# EAGLE board Qwiic-Grideye-Panel (EAGLE 7.7.0)
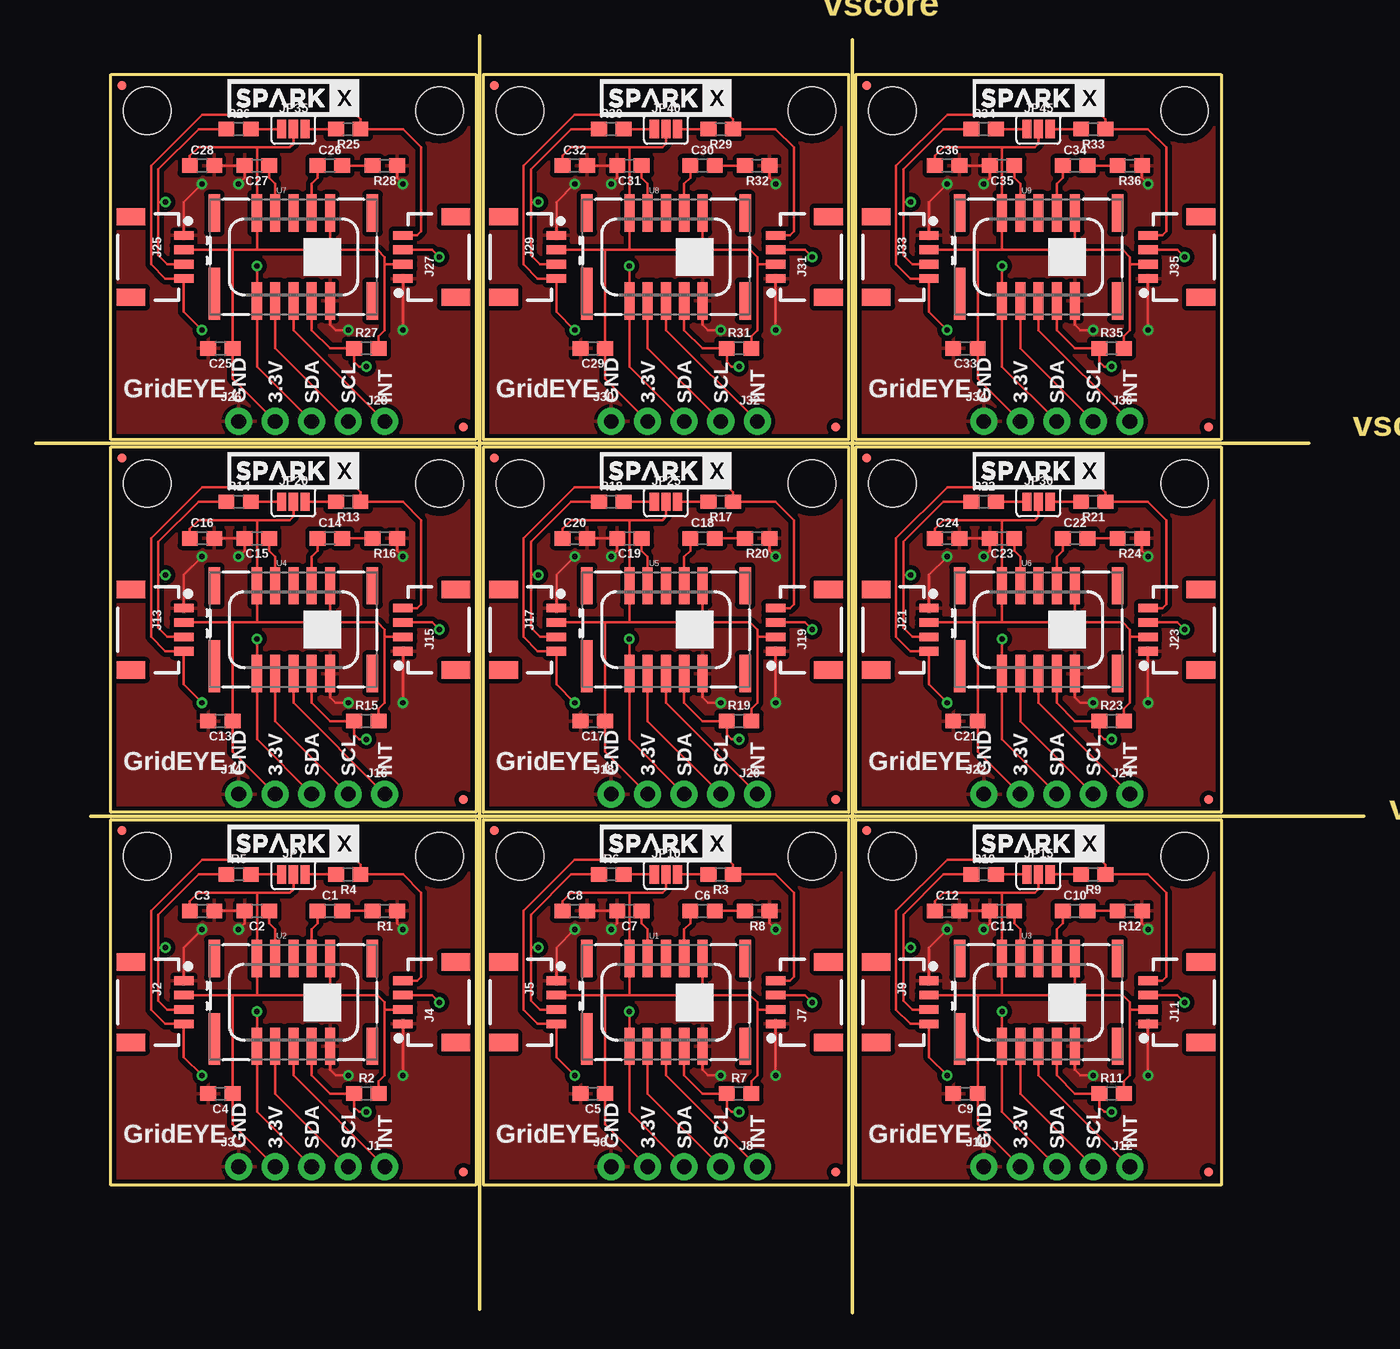
[diagram p0: board, top side]
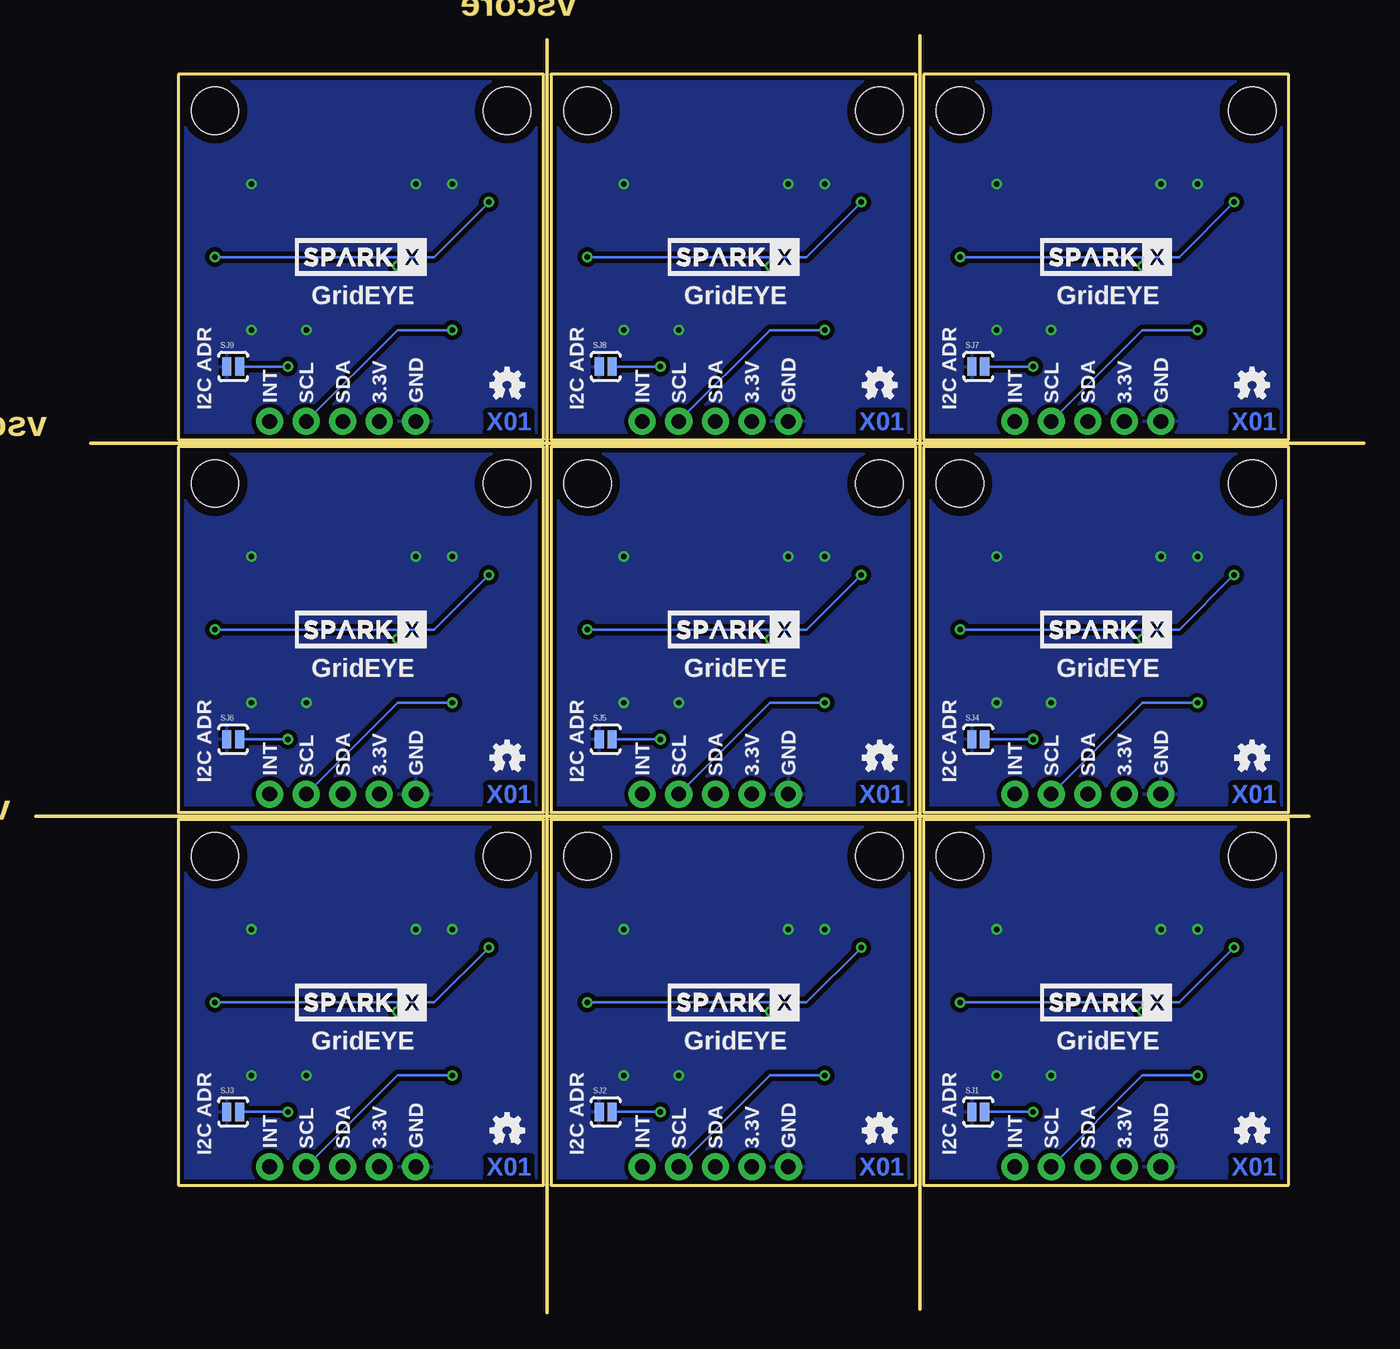
[diagram p1: board, bottom side, seen from below]

Size 92.33 x 88.77 mm. Coordinates in mm from the lower left corner, seen from the top.
Outline: 3.81,34.54 92.33,34.54
Outline: 0,60.45 88.52,60.45
Outline: 56.77,0 56.77,88.52
Outline: 30.86,0.25 30.86,88.77
Outline: 5.21,8.89 5.21,34.29 30.61,34.29 30.61,8.89 5.21,8.89
Outline: 31.12,8.89 31.12,34.29 56.52,34.29 56.52,8.89 31.12,8.89
Outline: 57.02,8.89 57.02,34.29 82.42,34.29 82.42,8.89 57.02,8.89
Outline: 5.21,34.8 5.21,60.2 30.61,60.2 30.61,34.8 5.21,34.8
Outline: 31.12,34.8 31.12,60.2 56.52,60.2 56.52,34.8 31.12,34.8
Outline: 57.02,34.8 57.02,60.2 82.42,60.2 82.42,34.8 57.02,34.8
Outline: 5.21,60.71 5.21,86.11 30.61,86.11 30.61,60.71 5.21,60.71
Outline: 31.12,60.71 31.12,86.11 56.52,86.11 56.52,60.71 31.12,60.71
Outline: 57.02,60.71 57.02,86.11 82.42,86.11 82.42,60.71 57.02,60.71
Copper layers (1*16): Top 0.035mm / dielectric 1.5mm / Bottom 0.035mm
Design rules "SparkFun-2-layer-TIGHT": minimum track width 7mil, minimum drill 15mil, track to track 7mil, track to pad 7mil, pad to pad 7mil, via to via 7mil, smd to smd 7mil, copper to edge 7mil, drill to drill 7mil, minimum pad ring 7mil, minimum via ring 7mil, stop-mask expansion 4mil, vias tented up to drill 25mil, thermal gap 10mil

## Footprints (pad centres in the part's own frame; a part is rotated, then mirrored left to right if it is on the bottom)
0603 = smd 1.1 x 1: 1 -0.85,0; 2 0.85,0
1X01_NO_SILK = drill 1.016 pad 1.88: 1 0,0
1X04_1MM_RA = smd 0.6 x 1.35: 1 -1.5,0; 2 -0.5,0; 3 0.5,0; 4 1.5,0 | smd 1.2 x 2: NC1 2.8,-3.675; NC2 -2.8,-3.675
1X04_NO_SILK = drill 1.016 pad 1.88: 1 0,0; 2 2.54,0; 3 5.08,0; 4 7.62,0
STAND-OFF = hole 3.302: 0,0
MICRO-FIDUCIAL = smd 0.635 x 0.635: 1 0,0
SMT-JUMPER_3_2-NC_PASTE_SILK = smd 0.635 x 1.27: 1 -0.813,0; 2 0,0; 3 0.813,0
SJ_2S-NO = smd 0.635 x 1.27: 1 -0.45,0; 2 0.45,0
GRIDEYE-AMG88 = smd 0.8 x 3.6: 1 -5.5,-2.55 | smd 0.7 x 2.6: 2 -2.54,-3.05; 3 -1.27,-3.05; 4 0,-3.05; 5 1.27,-3.05; 6 2.54,-3.05; 9 2.54,3.05; 10 1.27,3.05; 11 0,3.05; 12 -1.27,3.05; 13 -2.54,3.05 | smd 0.8 x 2.6: 7 5.5,-3.05; 8 5.5,3.05; 14 -5.5,3.05

## Placement (x,y rotation side)
C1  1.0uF  [0603]  20.45,27.94 0 top
C2  2.2uF  [0603]  15.37,27.94 180 top
C3  10uF  [0603]  11.56,27.94 0 top
C4  0.1uF  [0603]  12.83,15.24 180 top
C5  0.1uF  [0603]  38.73,15.24 180 top
C6  1.0uF  [0603]  46.36,27.94 0 top
C7  2.2uF  [0603]  41.27,27.94 180 top
C8  10uF  [0603]  37.47,27.94 0 top
C9  0.1uF  [0603]  64.64,15.24 180 top
C10  1.0uF  [0603]  72.26,27.94 0 top
C11  2.2uF  [0603]  67.18,27.94 180 top
C12  10uF  [0603]  63.37,27.94 0 top
C13  0.1uF  [0603]  12.83,41.15 180 top
C14  1.0uF  [0603]  20.45,53.85 0 top
C15  2.2uF  [0603]  15.37,53.85 180 top
C16  10uF  [0603]  11.56,53.85 0 top
C17  0.1uF  [0603]  38.73,41.15 180 top
C18  1.0uF  [0603]  46.36,53.85 0 top
C19  2.2uF  [0603]  41.27,53.85 180 top
C20  10uF  [0603]  37.47,53.85 0 top
C21  0.1uF  [0603]  64.64,41.15 180 top
C22  1.0uF  [0603]  72.26,53.85 0 top
C23  2.2uF  [0603]  67.18,53.85 180 top
C24  10uF  [0603]  63.37,53.85 0 top
C25  0.1uF  [0603]  12.83,67.06 180 top
C26  1.0uF  [0603]  20.45,79.76 0 top
C27  2.2uF  [0603]  15.37,79.76 180 top
C28  10uF  [0603]  11.56,79.76 0 top
C29  0.1uF  [0603]  38.73,67.06 180 top
C30  1.0uF  [0603]  46.36,79.76 0 top
C31  2.2uF  [0603]  41.27,79.76 180 top
C32  10uF  [0603]  37.47,79.76 0 top
C33  0.1uF  [0603]  64.64,67.06 180 top
C34  1.0uF  [0603]  72.26,79.76 0 top
C35  2.2uF  [0603]  67.18,79.76 180 top
C36  10uF  [0603]  63.37,79.76 0 top
J1  [1X01_NO_SILK]  24.26,10.16 0 top
J2  SMD  [1X04_1MM_RA]  10.29,21.59 270 top
J3  PTH  [1X04_NO_SILK]  14.1,10.16 0 top
J4  SMD  [1X04_1MM_RA]  25.53,21.59 90 top
J5  SMD  [1X04_1MM_RA]  36.2,21.59 270 top
J6  PTH  [1X04_NO_SILK]  40.01,10.16 0 top
J7  SMD  [1X04_1MM_RA]  51.44,21.59 90 top
J8  [1X01_NO_SILK]  50.16,10.16 0 top
J9  SMD  [1X04_1MM_RA]  62.1,21.59 270 top
J10  PTH  [1X04_NO_SILK]  65.91,10.16 0 top
J11  SMD  [1X04_1MM_RA]  77.34,21.59 90 top
J12  [1X01_NO_SILK]  76.07,10.16 0 top
J13  SMD  [1X04_1MM_RA]  10.29,47.5 270 top
J14  PTH  [1X04_NO_SILK]  14.1,36.07 0 top
J15  SMD  [1X04_1MM_RA]  25.53,47.5 90 top
J16  [1X01_NO_SILK]  24.26,36.07 0 top
J17  SMD  [1X04_1MM_RA]  36.2,47.5 270 top
J18  PTH  [1X04_NO_SILK]  40.01,36.07 0 top
J19  SMD  [1X04_1MM_RA]  51.44,47.5 90 top
J20  [1X01_NO_SILK]  50.16,36.07 0 top
J21  SMD  [1X04_1MM_RA]  62.1,47.5 270 top
J22  PTH  [1X04_NO_SILK]  65.91,36.07 0 top
J23  SMD  [1X04_1MM_RA]  77.34,47.5 90 top
J24  [1X01_NO_SILK]  76.07,36.07 0 top
J25  SMD  [1X04_1MM_RA]  10.29,73.41 270 top
J26  PTH  [1X04_NO_SILK]  14.1,61.98 0 top
J27  SMD  [1X04_1MM_RA]  25.53,73.41 90 top
J28  [1X01_NO_SILK]  24.26,61.98 0 top
J29  SMD  [1X04_1MM_RA]  36.2,73.41 270 top
J30  PTH  [1X04_NO_SILK]  40.01,61.98 0 top
J31  SMD  [1X04_1MM_RA]  51.44,73.41 90 top
J32  [1X01_NO_SILK]  50.16,61.98 0 top
J33  SMD  [1X04_1MM_RA]  62.1,73.41 270 top
J34  PTH  [1X04_NO_SILK]  65.91,61.98 0 top
J35  SMD  [1X04_1MM_RA]  77.34,73.41 90 top
J36  [1X01_NO_SILK]  76.07,61.98 0 top
JP1  STAND-OFF  [STAND-OFF]  33.66,31.75 0 top
JP2  FIDUCIALUFIDUCIAL  [MICRO-FIDUCIAL]  29.72,9.78 0 top
JP3  STAND-OFF  [STAND-OFF]  7.75,31.75 0 top
JP4  STAND-OFF  [STAND-OFF]  28.07,31.75 0 top
JP5  STAND-OFF  [STAND-OFF]  53.98,31.75 0 top
JP6  FIDUCIALUFIDUCIAL  [MICRO-FIDUCIAL]  5.97,33.53 0 top
JP7  [SMT-JUMPER_3_2-NC_PASTE_SILK]  17.91,30.48 0 top
JP8  FIDUCIALUFIDUCIAL  [MICRO-FIDUCIAL]  55.63,9.78 0 top
JP9  FIDUCIALUFIDUCIAL  [MICRO-FIDUCIAL]  31.88,33.53 0 top
JP10  [SMT-JUMPER_3_2-NC_PASTE_SILK]  43.81,30.48 0 top
JP11  STAND-OFF  [STAND-OFF]  59.56,31.75 0 top
JP12  STAND-OFF  [STAND-OFF]  79.88,31.75 0 top
JP13  FIDUCIALUFIDUCIAL  [MICRO-FIDUCIAL]  81.53,9.78 0 top
JP14  FIDUCIALUFIDUCIAL  [MICRO-FIDUCIAL]  57.79,33.53 0 top
JP15  [SMT-JUMPER_3_2-NC_PASTE_SILK]  69.72,30.48 0 top
JP16  STAND-OFF  [STAND-OFF]  7.75,57.66 0 top
JP17  STAND-OFF  [STAND-OFF]  28.07,57.66 0 top
JP18  FIDUCIALUFIDUCIAL  [MICRO-FIDUCIAL]  29.72,35.69 0 top
JP19  FIDUCIALUFIDUCIAL  [MICRO-FIDUCIAL]  5.97,59.44 0 top
JP20  [SMT-JUMPER_3_2-NC_PASTE_SILK]  17.91,56.39 0 top
JP21  STAND-OFF  [STAND-OFF]  33.66,57.66 0 top
JP22  STAND-OFF  [STAND-OFF]  53.98,57.66 0 top
JP23  FIDUCIALUFIDUCIAL  [MICRO-FIDUCIAL]  55.63,35.69 0 top
JP24  FIDUCIALUFIDUCIAL  [MICRO-FIDUCIAL]  31.88,59.44 0 top
JP25  [SMT-JUMPER_3_2-NC_PASTE_SILK]  43.81,56.39 0 top
JP26  STAND-OFF  [STAND-OFF]  59.56,57.66 0 top
JP27  STAND-OFF  [STAND-OFF]  79.88,57.66 0 top
JP28  FIDUCIALUFIDUCIAL  [MICRO-FIDUCIAL]  81.53,35.69 0 top
JP29  FIDUCIALUFIDUCIAL  [MICRO-FIDUCIAL]  57.79,59.44 0 top
JP30  [SMT-JUMPER_3_2-NC_PASTE_SILK]  69.72,56.39 0 top
JP31  STAND-OFF  [STAND-OFF]  7.75,83.57 0 top
JP32  STAND-OFF  [STAND-OFF]  28.07,83.57 0 top
JP33  FIDUCIALUFIDUCIAL  [MICRO-FIDUCIAL]  29.72,61.59 0 top
JP34  FIDUCIALUFIDUCIAL  [MICRO-FIDUCIAL]  5.97,85.34 0 top
JP35  [SMT-JUMPER_3_2-NC_PASTE_SILK]  17.91,82.3 0 top
JP36  STAND-OFF  [STAND-OFF]  33.66,83.57 0 top
JP37  STAND-OFF  [STAND-OFF]  53.98,83.57 0 top
JP38  FIDUCIALUFIDUCIAL  [MICRO-FIDUCIAL]  55.63,61.59 0 top
JP39  FIDUCIALUFIDUCIAL  [MICRO-FIDUCIAL]  31.88,85.34 0 top
JP40  [SMT-JUMPER_3_2-NC_PASTE_SILK]  43.81,82.3 0 top
JP41  STAND-OFF  [STAND-OFF]  59.56,83.57 0 top
JP42  STAND-OFF  [STAND-OFF]  79.88,83.57 0 top
JP43  FIDUCIALUFIDUCIAL  [MICRO-FIDUCIAL]  81.53,61.59 0 top
JP44  FIDUCIALUFIDUCIAL  [MICRO-FIDUCIAL]  57.79,85.34 0 top
JP45  [SMT-JUMPER_3_2-NC_PASTE_SILK]  69.72,82.3 0 top
LOGO1  OSHW-LOGOMINI  [OSHW-LOGO-MINI]  7.75,12.7 0 bottom
LOGO2  OSHW-LOGOMINI  [OSHW-LOGO-MINI]  33.66,12.7 0 bottom
LOGO3  OSHW-LOGOMINI  [OSHW-LOGO-MINI]  59.56,12.7 0 bottom
LOGO4  OSHW-LOGOMINI  [OSHW-LOGO-MINI]  7.75,38.61 0 bottom
LOGO5  OSHW-LOGOMINI  [OSHW-LOGO-MINI]  33.66,38.61 0 bottom
LOGO6  OSHW-LOGOMINI  [OSHW-LOGO-MINI]  59.56,38.61 0 bottom
LOGO7  OSHW-LOGOMINI  [OSHW-LOGO-MINI]  7.75,64.52 0 bottom
LOGO8  OSHW-LOGOMINI  [OSHW-LOGO-MINI]  33.66,64.52 0 bottom
LOGO9  OSHW-LOGOMINI  [OSHW-LOGO-MINI]  59.56,64.52 0 bottom
R1  20  [0603]  24.26,27.94 180 top
R2  10k  [0603]  22.99,15.24 0 top
R3  4.7k  [0603]  47.62,30.48 180 top
R4  4.7k  [0603]  21.72,30.48 180 top
R5  4.7k  [0603]  14.1,30.48 0 top
R6  4.7k  [0603]  40.01,30.48 0 top
R7  10k  [0603]  48.9,15.24 0 top
R8  20  [0603]  50.16,27.94 180 top
R9  4.7k  [0603]  73.53,30.48 180 top
R10  4.7k  [0603]  65.91,30.48 0 top
R11  10k  [0603]  74.8,15.24 0 top
R12  20  [0603]  76.07,27.94 180 top
R13  4.7k  [0603]  21.72,56.39 180 top
R14  4.7k  [0603]  14.1,56.39 0 top
R15  10k  [0603]  22.99,41.15 0 top
R16  20  [0603]  24.26,53.85 180 top
R17  4.7k  [0603]  47.62,56.39 180 top
R18  4.7k  [0603]  40.01,56.39 0 top
R19  10k  [0603]  48.9,41.15 0 top
R20  20  [0603]  50.16,53.85 180 top
R21  4.7k  [0603]  73.53,56.39 180 top
R22  4.7k  [0603]  65.91,56.39 0 top
R23  10k  [0603]  74.8,41.15 0 top
R24  20  [0603]  76.07,53.85 180 top
R25  4.7k  [0603]  21.72,82.3 180 top
R26  4.7k  [0603]  14.1,82.3 0 top
R27  10k  [0603]  22.99,67.06 0 top
R28  20  [0603]  24.26,79.76 180 top
R29  4.7k  [0603]  47.62,82.3 180 top
R30  4.7k  [0603]  40.01,82.3 0 top
R31  10k  [0603]  48.9,67.06 0 top
R32  20  [0603]  50.16,79.76 180 top
R33  4.7k  [0603]  73.53,82.3 180 top
R34  4.7k  [0603]  65.91,82.3 0 top
R35  10k  [0603]  74.8,67.06 0 top
R36  20  [0603]  76.07,79.76 180 top
SJ1  [SJ_2S-NO]  26.8,13.97 0 bottom
SJ2  [SJ_2S-NO]  52.7,13.97 0 bottom
SJ3  [SJ_2S-NO]  78.61,13.97 0 bottom
SJ4  [SJ_2S-NO]  26.8,39.88 0 bottom
SJ5  [SJ_2S-NO]  52.7,39.88 0 bottom
SJ6  [SJ_2S-NO]  78.61,39.88 0 bottom
SJ7  [SJ_2S-NO]  26.8,65.79 0 bottom
SJ8  [SJ_2S-NO]  52.7,65.79 0 bottom
SJ9  [SJ_2S-NO]  78.61,65.79 0 bottom
U1  GRIDEYE  [GRIDEYE-AMG88]  43.81,21.59 0 top
U2  GRIDEYE  [GRIDEYE-AMG88]  17.91,21.59 0 top
U3  GRIDEYE  [GRIDEYE-AMG88]  69.72,21.59 0 top
U4  GRIDEYE  [GRIDEYE-AMG88]  17.91,47.5 0 top
U5  GRIDEYE  [GRIDEYE-AMG88]  43.81,47.5 0 top
U6  GRIDEYE  [GRIDEYE-AMG88]  69.72,47.5 0 top
U7  GRIDEYE  [GRIDEYE-AMG88]  17.91,73.41 0 top
U8  GRIDEYE  [GRIDEYE-AMG88]  43.81,73.41 0 top
U9  GRIDEYE  [GRIDEYE-AMG88]  69.72,73.41 0 top
U$1  SPARKX-LOGO4  [SPARKX-MEDIUM]  17.91,21.59 0 bottom
U$2  SPARKX-LOGO4  [SPARKX-MEDIUM]  17.91,32.64 0 top
U$3  SPARKX-LOGO4  [SPARKX-MEDIUM]  43.81,32.64 0 top
U$4  SPARKX-LOGO4  [SPARKX-MEDIUM]  43.81,21.59 0 bottom
U$5  SPARKX-LOGO4  [SPARKX-MEDIUM]  69.72,32.64 0 top
U$6  SPARKX-LOGO4  [SPARKX-MEDIUM]  69.72,21.59 0 bottom
U$7  SPARKX-LOGO4  [SPARKX-MEDIUM]  17.91,58.55 0 top
U$8  SPARKX-LOGO4  [SPARKX-MEDIUM]  17.91,47.5 0 bottom
U$9  SPARKX-LOGO4  [SPARKX-MEDIUM]  43.81,58.55 0 top
U$10  SPARKX-LOGO4  [SPARKX-MEDIUM]  43.81,47.5 0 bottom
U$11  SPARKX-LOGO4  [SPARKX-MEDIUM]  69.72,58.55 0 top
U$12  SPARKX-LOGO4  [SPARKX-MEDIUM]  69.72,47.5 0 bottom
U$13  SPARKX-LOGO4  [SPARKX-MEDIUM]  17.91,84.45 0 top
U$14  SPARKX-LOGO4  [SPARKX-MEDIUM]  17.91,73.41 0 bottom
U$15  SPARKX-LOGO4  [SPARKX-MEDIUM]  43.81,84.45 0 top
U$16  SPARKX-LOGO4  [SPARKX-MEDIUM]  43.81,73.41 0 bottom
U$17  SPARKX-LOGO4  [SPARKX-MEDIUM]  69.72,84.45 0 top
U$18  SPARKX-LOGO4  [SPARKX-MEDIUM]  69.72,73.41 0 bottom

## Library data of the parts
C1 C6 C10 C14 C18 C22 C26 C30 C34 = SparkFun-Capacitors; PROD_ID: CAP-00868
C2 C7 C11 C15 C19 C23 C27 C31 C35 = SparkFun-Capacitors; PROD_ID: CAP-07888
C3 C8 C12 C16 C20 C24 C28 C32 C36 = SparkFun-Capacitors; PROD_ID: CAP-11015
C4 C5 C9 C13 C17 C21 C25 C29 C33 = SparkFun-Capacitors; PROD_ID: CAP-00810
J1 J8 J12 J16 J20 J24 J28 J32 J36 = SparkFun-Connectors
J2-J7 J9-J11 J13-J15 J17-J19 J21-J23 J25-J27 J29-J31 J33-J35 U$1-U$18 = SparkX
JP1-JP6 JP8 JP9 JP11-JP14 JP16-JP19 JP21-JP24 JP26-JP29 JP31-JP34 JP36-JP39 JP41-JP44 SJ1-SJ9 = SparkFun
JP7 JP10 JP15 JP20 JP25 JP30 JP35 JP40 JP45 = SparkFun-Jumpers
LOGO1-LOGO9 = SparkFun-Aesthetics
R1 R8 R12 R16 R20 R24 R28 R32 R36 = SparkFun-Resistors; PROD_ID: RES-07862
R2 R7 R11 R15 R19 R23 R27 R31 R35 = SparkFun-Resistors; PROD_ID: RES-00824
R3-R6 R9 R10 R13 R14 R17 R18 R21 R22 R25 R26 R29 R30 R33 R34 = SparkFun-Resistors; PROD_ID: RES-07857
U1-U9 = Grideye

## Nets
3.3V: C3.1 C4.1 J2.2 J3.2 J4.2 JP7.2 R2.2 U2.9 U2.13
3.3V1: C5.1 C8.1 J5.2 J6.2 J7.2 JP10.2 R7.2 U1.9 U1.13
3.3V2: C9.1 C12.1 J9.2 J10.2 J11.2 JP15.2 R11.2 U3.9 U3.13
3.3V3: C13.1 C16.1 J13.2 J14.2 J15.2 JP20.2 R15.2 U4.9 U4.13
3.3V4: C17.1 C20.1 J17.2 J18.2 J19.2 JP25.2 R19.2 U5.9 U5.13
3.3V5: C21.1 C24.1 J21.2 J22.2 J23.2 JP30.2 R23.2 U6.9 U6.13
3.3V6: C25.1 C28.1 J25.2 J26.2 J27.2 JP35.2 R27.2 U7.9 U7.13
3.3V7: C29.1 C32.1 J29.2 J30.2 J31.2 JP40.2 R31.2 U8.9 U8.13
3.3V8: C33.1 C36.1 J33.2 J34.2 J35.2 JP45.2 R35.2 U9.9 U9.13
ADDR: R2.1 SJ1.2 U2.5
ADDR1: R7.1 SJ2.2 U1.5
ADDR2: R11.1 SJ3.2 U3.5
ADDR3: R15.1 SJ4.2 U4.5
ADDR4: R19.1 SJ5.2 U5.5
ADDR5: R23.1 SJ6.2 U6.5
ADDR6: R27.1 SJ7.2 U7.5
ADDR7: R31.1 SJ8.2 U8.5
ADDR8: R35.1 SJ9.2 U9.5
GND: C2.2 C3.2 C4.2 J2.1 J3.1 J4.1 R1.1 SJ1.1 U2.6
GND1: C5.2 C7.2 C8.2 J5.1 J6.1 J7.1 R8.1 SJ2.1 U1.6
GND2: C9.2 C11.2 C12.2 J9.1 J10.1 J11.1 R12.1 SJ3.1 U3.6
GND3: C13.2 C15.2 C16.2 J13.1 J14.1 J15.1 R16.1 SJ4.1 U4.6
GND4: C17.2 C19.2 C20.2 J17.1 J18.1 J19.1 R20.1 SJ5.1 U5.6
GND5: C21.2 C23.2 C24.2 J21.1 J22.1 J23.1 R24.1 SJ6.1 U6.6
GND6: C25.2 C27.2 C28.2 J25.1 J26.1 J27.1 R28.1 SJ7.1 U7.6
GND7: C29.2 C31.2 C32.2 J29.1 J30.1 J31.1 R32.1 SJ8.1 U8.6
GND8: C33.2 C35.2 C36.2 J33.1 J34.1 J35.1 R36.1 SJ9.1 U9.6
INT: J1.1 U2.4
INT1: J8.1 U1.4
INT2: J12.1 U3.4
INT3: J16.1 U4.4
INT4: J20.1 U5.4
INT5: J24.1 U6.4
INT6: J28.1 U7.4
INT7: J32.1 U8.4
INT8: J36.1 U9.4
N$1: JP7.1 R5.2
N$2: JP7.3 R4.2
N$3: C2.1 U2.12
N$4: C1.1 U2.10
N$5: C1.2 R1.2
N$6: JP10.1 R6.2
N$7: JP10.3 R3.2
N$8: C7.1 U1.12
N$9: C6.1 U1.10
N$10: C6.2 R8.2
N$11: JP15.1 R10.2
N$12: JP15.3 R9.2
N$13: C11.1 U3.12
N$14: C10.1 U3.10
N$15: C10.2 R12.2
N$16: JP20.1 R14.2
N$17: JP20.3 R13.2
N$18: C15.1 U4.12
N$19: C14.1 U4.10
N$20: C14.2 R16.2
N$21: JP25.1 R18.2
N$22: JP25.3 R17.2
N$23: C19.1 U5.12
N$24: C18.1 U5.10
N$25: C18.2 R20.2
N$26: JP30.1 R22.2
N$27: JP30.3 R21.2
N$28: C23.1 U6.12
N$29: C22.1 U6.10
N$30: C22.2 R24.2
N$31: JP35.1 R26.2
N$32: JP35.3 R25.2
N$33: C27.1 U7.12
N$34: C26.1 U7.10
N$35: C26.2 R28.2
N$36: JP40.1 R30.2
N$37: JP40.3 R29.2
N$38: C31.1 U8.12
N$39: C30.1 U8.10
N$40: C30.2 R32.2
N$41: JP45.1 R34.2
N$42: JP45.3 R33.2
N$43: C35.1 U9.12
N$44: C34.1 U9.10
N$45: C34.2 R36.2
SCL: J2.4 J3.4 J4.4 R4.1 U2.3
SCL1: J5.4 J6.4 J7.4 R3.1 U1.3
SCL2: J9.4 J10.4 J11.4 R9.1 U3.3
SCL3: J13.4 J14.4 J15.4 R13.1 U4.3
SCL4: J17.4 J18.4 J19.4 R17.1 U5.3
SCL5: J21.4 J22.4 J23.4 R21.1 U6.3
SCL6: J25.4 J26.4 J27.4 R25.1 U7.3
SCL7: J29.4 J30.4 J31.4 R29.1 U8.3
SCL8: J33.4 J34.4 J35.4 R33.1 U9.3
SDA: J2.3 J3.3 J4.3 R5.1 U2.2
SDA1: J5.3 J6.3 J7.3 R6.1 U1.2
SDA2: J9.3 J10.3 J11.3 R10.1 U3.2
SDA3: J13.3 J14.3 J15.3 R14.1 U4.2
SDA4: J17.3 J18.3 J19.3 R18.1 U5.2
SDA5: J21.3 J22.3 J23.3 R22.1 U6.2
SDA6: J25.3 J26.3 J27.3 R26.1 U7.2
SDA7: J29.3 J30.3 J31.3 R30.1 U8.2
SDA8: J33.3 J34.3 J35.3 R34.1 U9.2

## Tracks (layer width: path | path; a pad name or v marks a point on that pad's centre or on a via)
3.3V
  Top 0.178: J2.2 13.72,22.09 | JP7.2 17.91,29.46 17.65,29.21 15.37,29.21 | 15.37,29.21 U2.13 15.37,22.09 | J4.2 24.27,21.09 24.26,21.08 | J3.2 13.68,13.12 C4.1 13.68,22.05 13.72,22.09 | R2.2 23.84,16.09 24.26,16.51 24.26,21.08 | 24.26,21.08 24.26,21.59 23.76,22.09 20.45,22.09 | 13.72,22.09 15.37,22.09 | 15.37,22.09 20.45,22.09 | U2.9 20.45,22.09 | 15.37,29.21 11.3,29.21 10.71,28.61 C3.1
3.3V1
  Top 0.178: J5.2 39.62,22.09 | JP10.2 43.81,29.46 43.56,29.21 41.27,29.21 | 41.27,29.21 U1.13 41.27,22.09 | J7.2 50.17,21.09 50.16,21.08 | J6.2 39.59,13.12 C5.1 39.59,22.05 39.62,22.09 | R7.2 49.74,16.09 50.16,16.51 50.16,21.08 | 50.16,21.08 50.16,21.59 49.66,22.09 46.36,22.09 | 39.62,22.09 41.27,22.09 | 41.27,22.09 46.36,22.09 | U1.9 46.36,22.09 | 41.27,29.21 37.21,29.21 36.62,28.61 C8.1
3.3V2
  Top 0.178: 62.09,22.1 J9.2 65.53,22.09 | JP15.2 69.72,29.46 69.47,29.21 67.18,29.21 | 67.18,29.21 U3.13 67.18,22.09 | J11.2 76.08,21.09 76.07,21.08 | J10.2 65.49,13.12 C9.1 65.49,22.05 65.53,22.09 | R11.2 75.65,16.09 76.07,16.51 76.07,21.08 | 76.07,21.08 76.07,21.59 75.57,22.09 72.26,22.09 | 65.53,22.09 67.18,22.09 | 67.18,22.09 72.26,22.09 | U3.9 72.26,22.09 | 67.18,29.21 63.12,29.21 62.52,28.61 C12.1
3.3V3
  Top 0.178: J13.2 13.72,48 | JP20.2 17.91,55.37 17.65,55.12 15.37,55.12 | 15.37,55.12 U4.13 15.37,48 | J15.2 24.27,47 24.26,46.99 | J14.2 13.68,39.03 C13.1 13.68,47.96 13.72,48 | R15.2 23.84,42 24.26,42.42 24.26,46.99 | 24.26,46.99 24.26,47.5 23.76,48 20.45,48 | 13.72,48 15.37,48 | 15.37,48 20.45,48 | U4.9 20.45,48 | 15.37,55.12 11.3,55.12 10.71,54.52 C16.1
3.3V4
  Top 0.178: J17.2 39.62,48 | JP25.2 43.81,55.37 43.56,55.12 41.27,55.12 | 41.27,55.12 U5.13 41.27,48 | J19.2 50.17,47 50.16,46.99 | J18.2 39.59,39.03 C17.1 39.59,47.96 39.62,48 | R19.2 49.74,42 50.16,42.42 50.16,46.99 | 50.16,46.99 50.16,47.5 49.66,48 46.36,48 | 39.62,48 41.27,48 | 41.27,48 46.36,48 | U5.9 46.36,48 | 41.27,55.12 37.21,55.12 36.62,54.52 C20.1
3.3V5
  Top 0.178: 62.09,48.01 J21.2 65.53,48 | JP30.2 69.72,55.37 69.47,55.12 67.18,55.12 | 67.18,55.12 U6.13 67.18,48 | J23.2 76.08,47 76.07,46.99 | J22.2 65.49,39.03 C21.1 65.49,47.96 65.53,48 | R23.2 75.65,42 76.07,42.42 76.07,46.99 | 76.07,46.99 76.07,47.5 75.57,48 72.26,48 | 65.53,48 67.18,48 | 67.18,48 72.26,48 | U6.9 72.26,48 | 67.18,55.12 63.12,55.12 62.52,54.52 C24.1
3.3V6
  Top 0.178: J25.2 13.72,73.91 | JP35.2 17.91,81.28 17.65,81.03 15.37,81.03 | 15.37,81.03 U7.13 15.37,73.91 | J27.2 24.27,72.91 24.26,72.9 | J26.2 13.68,64.94 C25.1 13.68,73.87 13.72,73.91 | R27.2 23.84,67.91 24.26,68.33 24.26,72.9 | 24.26,72.9 24.26,73.41 23.76,73.91 20.45,73.91 | 13.72,73.91 15.37,73.91 | 15.37,73.91 20.45,73.91 | U7.9 20.45,73.91 | 15.37,81.03 11.3,81.03 10.71,80.43 C28.1
3.3V7
  Top 0.178: J29.2 39.62,73.91 | JP40.2 43.81,81.28 43.56,81.03 41.27,81.03 | 41.27,81.03 U8.13 41.27,73.91 | J31.2 50.17,72.91 50.16,72.9 | J30.2 39.59,64.94 C29.1 39.59,73.87 39.62,73.91 | R31.2 49.74,67.91 50.16,68.33 50.16,72.9 | 50.16,72.9 50.16,73.41 49.66,73.91 46.36,73.91 | 39.62,73.91 41.27,73.91 | 41.27,73.91 46.36,73.91 | U8.9 46.36,73.91 | 41.27,81.03 37.21,81.03 36.62,80.43 C32.1
3.3V8
  Top 0.178: 62.09,73.91 J33.2 65.53,73.91 | JP45.2 69.72,81.28 69.47,81.03 67.18,81.03 | 67.18,81.03 U9.13 67.18,73.91 | J35.2 76.08,72.91 76.07,72.9 | J34.2 65.49,64.94 C33.1 65.49,73.87 65.53,73.91 | R35.2 75.65,67.91 76.07,68.33 76.07,72.9 | 76.07,72.9 76.07,73.41 75.57,73.91 72.26,73.91 | 65.53,73.91 67.18,73.91 | 67.18,73.91 72.26,73.91 | U9.9 72.26,73.91 | 67.18,81.03 63.12,81.03 62.52,80.43 C36.1
ADDR  (via drill 0.38)
  Top 0.178: U2.5 19.18,16.51 20.45,15.24 R2.1 22.14,14.31 22.48,13.97 v22.99,13.97
  Bottom 0.178: SJ1.2 v22.99,13.97
ADDR1  (via drill 0.38)
  Top 0.178: U1.5 45.09,16.51 46.36,15.24 R7.1 48.05,14.31 48.39,13.97 v48.9,13.97
  Bottom 0.178: SJ2.2 v48.9,13.97
ADDR2  (via drill 0.38)
  Top 0.178: U3.5 70.99,16.51 72.26,15.24 R11.1 73.95,14.31 74.29,13.97 v74.8,13.97
  Bottom 0.178: SJ3.2 v74.8,13.97
ADDR3  (via drill 0.38)
  Top 0.178: U4.5 19.18,42.42 20.45,41.15 R15.1 22.14,40.22 22.48,39.88 v22.99,39.88
  Bottom 0.178: SJ4.2 v22.99,39.88
ADDR4  (via drill 0.38)
  Top 0.178: U5.5 45.09,42.42 46.36,41.15 R19.1 48.05,40.22 48.39,39.88 v48.9,39.88
  Bottom 0.178: SJ5.2 v48.9,39.88
ADDR5  (via drill 0.38)
  Top 0.178: U6.5 70.99,42.42 72.26,41.15 R23.1 73.95,40.22 74.29,39.88 v74.8,39.88
  Bottom 0.178: SJ6.2 v74.8,39.88
ADDR6  (via drill 0.38)
  Top 0.178: U7.5 19.18,68.33 20.45,67.06 R27.1 22.14,66.13 22.48,65.79 v22.99,65.79
  Bottom 0.178: SJ7.2 v22.99,65.79
ADDR7  (via drill 0.38)
  Top 0.178: U8.5 45.09,68.33 46.36,67.06 R31.1 48.05,66.13 48.39,65.79 v48.9,65.79
  Bottom 0.178: SJ8.2 v48.9,65.79
ADDR8  (via drill 0.38)
  Top 0.178: U9.5 70.99,68.33 72.26,67.06 R35.1 73.95,66.13 74.29,65.79 v74.8,65.79
  Bottom 0.178: SJ9.2 v74.8,65.79
GND  (via drill 0.38)
  Top 0.178: R1.1 25.11,27.09 v25.53,26.67 | v14.1,26.67 14.52,27.09 C2.2 C3.2 | J2.1 10.29,25.4 v11.56,26.67 | J4.1 v25.53,16.51 | U2.6 20.45,16.89 20.83,16.51 v21.72,16.51
  pour Bottom (isolate 0.305): 5.21,8.89 5.21,34.29 30.61,34.29 30.61,8.89
  pour Top (isolate 0.305): 5.21,8.89 5.21,34.29 30.61,34.29 30.61,8.89
GND1  (via drill 0.38)
  Top 0.178: R8.1 51.02,27.09 v51.44,26.67 | v40.01,26.67 40.43,27.09 C7.2 C8.2 | J5.1 36.2,25.4 v37.47,26.67 | J7.1 v51.44,16.51 | U1.6 46.36,16.89 46.74,16.51 v47.62,16.51
  pour Bottom (isolate 0.305): 31.12,8.89 31.12,34.29 56.52,34.29 56.52,8.89
  pour Top (isolate 0.305): 31.12,8.89 31.12,34.29 56.52,34.29 56.52,8.89
GND2  (via drill 0.38)
  Top 0.178: R12.1 76.92,27.09 v77.34,26.67 | v65.91,26.67 66.33,27.09 C11.2 C12.2 | J9.1 62.1,25.4 v63.37,26.67 | J11.1 v77.34,16.51 | U3.6 72.26,16.89 72.64,16.51 v73.53,16.51
  pour Bottom (isolate 0.305): 57.02,8.89 57.02,34.29 82.42,34.29 82.42,8.89
  pour Top (isolate 0.305): 57.02,8.89 57.02,34.29 82.42,34.29 82.42,8.89
GND3  (via drill 0.38)
  Top 0.178: R16.1 25.11,53 v25.53,52.58 | v14.1,52.58 14.52,53 C15.2 C16.2 | J13.1 10.29,51.31 v11.56,52.58 | J15.1 v25.53,42.42 | U4.6 20.45,42.8 20.83,42.42 v21.72,42.42
  pour Bottom (isolate 0.305): 5.21,34.8 5.21,60.2 30.61,60.2 30.61,34.8
  pour Top (isolate 0.305): 5.21,34.8 5.21,60.2 30.61,60.2 30.61,34.8
GND4  (via drill 0.38)
  Top 0.178: R20.1 51.02,53 v51.44,52.58 | v40.01,52.58 40.43,53 C19.2 C20.2 | J17.1 36.2,51.31 v37.47,52.58 | J19.1 v51.44,42.42 | U5.6 46.36,42.8 46.74,42.42 v47.62,42.42
  pour Bottom (isolate 0.305): 31.12,34.8 31.12,60.2 56.52,60.2 56.52,34.8
  pour Top (isolate 0.305): 31.12,34.8 31.12,60.2 56.52,60.2 56.52,34.8
GND5  (via drill 0.38)
  Top 0.178: R24.1 76.92,53 v77.34,52.58 | v65.91,52.58 66.33,53 C23.2 C24.2 | J21.1 62.1,51.31 v63.37,52.58 | J23.1 v77.34,42.42 | U6.6 72.26,42.8 72.64,42.42 v73.53,42.42
  pour Bottom (isolate 0.305): 57.02,34.8 57.02,60.2 82.42,60.2 82.42,34.8
  pour Top (isolate 0.305): 57.02,34.8 57.02,60.2 82.42,60.2 82.42,34.8
GND6  (via drill 0.38)
  Top 0.178: R28.1 25.11,78.91 v25.53,78.49 | v14.1,78.49 14.52,78.91 C27.2 C28.2 | J25.1 10.29,77.22 v11.56,78.49 | J27.1 v25.53,68.33 | U7.6 20.45,68.71 20.83,68.33 v21.72,68.33
  pour Bottom (isolate 0.305): 5.21,60.71 5.21,86.11 30.61,86.11 30.61,60.71
  pour Top (isolate 0.305): 5.21,60.71 5.21,86.11 30.61,86.11 30.61,60.71
GND7  (via drill 0.38)
  Top 0.178: R32.1 51.02,78.91 v51.44,78.49 | v40.01,78.49 40.43,78.91 C31.2 C32.2 | J29.1 36.2,77.22 v37.47,78.49 | J31.1 v51.44,68.33 | U8.6 46.36,68.71 46.74,68.33 v47.62,68.33
  pour Bottom (isolate 0.305): 31.12,60.71 31.12,86.11 56.52,86.11 56.52,60.71
  pour Top (isolate 0.305): 31.12,60.71 31.12,86.11 56.52,86.11 56.52,60.71
GND8  (via drill 0.38)
  Top 0.178: R36.1 76.92,78.91 v77.34,78.49 | v65.91,78.49 66.33,78.91 C35.2 C36.2 | J33.1 62.1,77.22 v63.37,78.49 | J35.1 v77.34,68.33 | U9.6 72.26,68.71 72.64,68.33 v73.53,68.33
  pour Bottom (isolate 0.305): 57.02,60.71 57.02,86.11 82.42,86.11 82.42,60.71
  pour Top (isolate 0.305): 57.02,60.71 57.02,86.11 82.42,86.11 82.42,60.71
INT
  Top 0.178: U2.4 17.91,16.51 J1.1
INT1
  Top 0.178: U1.4 43.81,16.51 J8.1
INT2
  Top 0.178: U3.4 69.72,16.51 J12.1
INT3
  Top 0.178: U4.4 17.91,42.42 J16.1
INT4
  Top 0.178: U5.4 43.81,42.42 J20.1
INT5
  Top 0.178: U6.4 69.72,42.42 J24.1
INT6
  Top 0.178: U7.4 17.91,68.33 J28.1
INT7
  Top 0.178: U8.4 43.81,68.33 J32.1
INT8
  Top 0.178: U9.4 69.72,68.33 J36.1
N$1
  Top 0.178: R5.2 JP7.1
N$2
  Top 0.178: JP7.3 R4.2
N$3
  Top 0.178: U2.12 16.64,26.67 16.22,27.09 C2.1
N$4
  Top 0.178: U2.10 19.18,26.67 19.6,27.09 C1.1
N$5
  Top 0.178: R1.2 C1.2
N$6
  Top 0.178: R6.2 JP10.1
N$7
  Top 0.178: JP10.3 R3.2
N$8
  Top 0.178: U1.12 42.55,26.67 42.12,27.09 C7.1
N$9
  Top 0.178: U1.10 45.09,26.67 45.51,27.09 C6.1
N$10
  Top 0.178: R8.2 C6.2
N$11
  Top 0.178: R10.2 JP15.1
N$12
  Top 0.178: JP15.3 R9.2
N$13
  Top 0.178: U3.12 68.45,26.67 68.03,27.09 C11.1
N$14
  Top 0.178: U3.10 70.99,26.67 71.41,27.09 C10.1
N$15
  Top 0.178: R12.2 C10.2
N$16
  Top 0.178: R14.2 JP20.1
N$17
  Top 0.178: JP20.3 R13.2
N$18
  Top 0.178: U4.12 16.64,52.58 16.22,53 C15.1
N$19
  Top 0.178: U4.10 19.18,52.58 19.6,53 C14.1
N$20
  Top 0.178: R16.2 C14.2
N$21
  Top 0.178: R18.2 JP25.1
N$22
  Top 0.178: JP25.3 R17.2
N$23
  Top 0.178: U5.12 42.55,52.58 42.12,53 C19.1
N$24
  Top 0.178: U5.10 45.09,52.58 45.51,53 C18.1
N$25
  Top 0.178: R20.2 C18.2
N$26
  Top 0.178: R22.2 JP30.1
N$27
  Top 0.178: JP30.3 R21.2
N$28
  Top 0.178: U6.12 68.45,52.58 68.03,53 C23.1
N$29
  Top 0.178: U6.10 70.99,52.58 71.41,53 C22.1
N$30
  Top 0.178: R24.2 C22.2
N$31
  Top 0.178: R26.2 JP35.1
N$32
  Top 0.178: JP35.3 R25.2
N$33
  Top 0.178: U7.12 16.64,78.49 16.22,78.91 C27.1
N$34
  Top 0.178: U7.10 19.18,78.49 19.6,78.91 C26.1
N$35
  Top 0.178: R28.2 C26.2
N$36
  Top 0.178: R30.2 JP40.1
N$37
  Top 0.178: JP40.3 R29.2
N$38
  Top 0.178: U8.12 42.55,78.49 42.12,78.91 C31.1
N$39
  Top 0.178: U8.10 45.09,78.49 45.51,78.91 C30.1
N$40
  Top 0.178: R32.2 C30.2
N$41
  Top 0.178: R34.2 JP45.1
N$42
  Top 0.178: JP45.3 R33.2
N$43
  Top 0.178: U9.12 68.45,78.49 68.03,78.91 C35.1
N$44
  Top 0.178: U9.10 70.99,78.49 71.41,78.91 C34.1
N$45
  Top 0.178: R36.2 C34.2
SCL  (via drill 0.38)
  Top 0.178: J4.4 26.52,23.09 26.8,23.37 26.8,29.21 25.53,30.48 R4.1 22.57,31.15 22.23,31.5 11.56,31.5 8,27.94 8,21.08 8.99,20.09 J2.4 10.29,17.78 v11.56,16.51 | U2.3 16.64,15.24 J3.4
  Bottom 0.178: v11.56,16.51 15.37,16.51 J3.4
SCL1  (via drill 0.38)
  Top 0.178: J7.4 52.43,23.09 52.7,23.37 52.7,29.21 51.44,30.48 R3.1 48.48,31.15 48.13,31.5 37.47,31.5 33.91,27.94 33.91,21.08 34.9,20.09 J5.4 36.2,17.78 v37.47,16.51 | U1.3 42.55,15.24 J6.4
  Bottom 0.178: v37.47,16.51 41.27,16.51 J6.4
SCL2  (via drill 0.38)
  Top 0.178: J11.4 78.33,23.09 78.61,23.37 78.61,29.21 77.34,30.48 R9.1 74.38,31.15 74.04,31.5 63.37,31.5 59.82,27.94 59.82,21.08 60.81,20.09 J9.4 62.1,17.78 v63.37,16.51 | U3.3 68.45,15.24 J10.4
  Bottom 0.178: v63.37,16.51 67.18,16.51 J10.4
SCL3  (via drill 0.38)
  Top 0.178: J15.4 26.52,49 26.8,49.28 26.8,55.12 25.53,56.39 R13.1 22.57,57.06 22.23,57.4 11.56,57.4 8,53.85 8,46.99 8.99,46 J13.4 10.29,43.69 v11.56,42.42 | U4.3 16.64,41.15 J14.4
  Bottom 0.178: v11.56,42.42 15.37,42.42 J14.4
SCL4  (via drill 0.38)
  Top 0.178: J19.4 52.43,49 52.7,49.28 52.7,55.12 51.44,56.39 R17.1 48.48,57.06 48.13,57.4 37.47,57.4 33.91,53.85 33.91,46.99 34.9,46 J17.4 36.2,43.69 v37.47,42.42 | U5.3 42.55,41.15 J18.4
  Bottom 0.178: v37.47,42.42 41.27,42.42 J18.4
SCL5  (via drill 0.38)
  Top 0.178: J23.4 78.33,49 78.61,49.28 78.61,55.12 77.34,56.39 R21.1 74.38,57.06 74.04,57.4 63.37,57.4 59.82,53.85 59.82,46.99 60.81,46 J21.4 62.1,43.69 v63.37,42.42 | U6.3 68.45,41.15 J22.4
  Bottom 0.178: v63.37,42.42 67.18,42.42 J22.4
SCL6  (via drill 0.38)
  Top 0.178: J27.4 26.52,74.91 26.8,75.18 26.8,81.03 25.53,82.3 R25.1 22.57,82.97 22.23,83.31 11.56,83.31 8,79.76 8,72.9 8.99,71.91 J25.4 10.29,69.6 v11.56,68.33 | U7.3 16.64,67.06 J26.4
  Bottom 0.178: v11.56,68.33 15.37,68.33 J26.4
SCL7  (via drill 0.38)
  Top 0.178: J31.4 52.43,74.91 52.7,75.18 52.7,81.03 51.44,82.3 R29.1 48.48,82.97 48.13,83.31 37.47,83.31 33.91,79.76 33.91,72.9 34.9,71.91 J29.4 36.2,69.6 v37.47,68.33 | U8.3 42.55,67.06 J30.4
  Bottom 0.178: v37.47,68.33 41.27,68.33 J30.4
SCL8  (via drill 0.38)
  Top 0.178: J35.4 78.33,74.91 78.61,75.18 78.61,81.03 77.34,82.3 R33.1 74.38,82.97 74.04,83.31 63.37,83.31 59.82,79.76 59.82,72.9 60.81,71.91 J33.4 62.1,69.6 v63.37,68.33 | U9.3 68.45,67.06 J34.4
  Bottom 0.178: v63.37,68.33 67.18,68.33 J34.4
SDA  (via drill 0.38)
  Top 0.178: J2.3 9.15,21.09 9.14,21.08 8.51,21.72 8.51,25.4 | J3.3 15.37,13.97 U2.2 v15.37,20.95 15.37,21.09 | R5.1 11.3,30.48 8.51,27.69 8.51,25.4 | J4.3 27.57,22.09 v28.07,21.59 | v9.02,25.4 8.51,25.4
  Bottom 0.178: v28.07,21.59 15.37,21.59 | 15.37,21.59 12.83,21.59 v9.02,25.4 | v15.37,20.95 15.37,21.59
SDA1  (via drill 0.38)
  Top 0.178: J5.3 35.06,21.09 35.05,21.08 34.42,21.72 34.42,25.4 | J6.3 41.27,13.97 U1.2 v41.27,20.95 41.27,21.09 | R6.1 37.21,30.48 34.42,27.69 34.42,25.4 | J7.3 53.48,22.09 v53.98,21.59 | v34.92,25.4 34.42,25.4
  Bottom 0.178: v53.98,21.59 41.27,21.59 | 41.27,21.59 38.73,21.59 v34.92,25.4 | v41.27,20.95 41.27,21.59
SDA2  (via drill 0.38)
  Top 0.178: 62.09,21.08 J9.3 60.97,21.09 60.96,21.08 60.33,21.72 60.33,25.4 | J10.3 67.18,13.97 U3.2 v67.18,20.95 67.18,21.09 | R10.1 63.12,30.48 60.33,27.69 60.33,25.4 | J11.3 79.38,22.09 v79.88,21.59 | v60.83,25.4 60.33,25.4
  Bottom 0.178: v79.88,21.59 67.18,21.59 | 67.18,21.59 64.64,21.59 v60.83,25.4 | v67.18,20.95 67.18,21.59
SDA3  (via drill 0.38)
  Top 0.178: J13.3 9.15,47 9.14,46.99 8.51,47.62 8.51,51.31 | J14.3 15.37,39.88 U4.2 v15.37,46.86 15.37,47 | R14.1 11.3,56.39 8.51,53.59 8.51,51.31 | J15.3 27.57,48 v28.07,47.5 | v9.02,51.31 8.51,51.31
  Bottom 0.178: v28.07,47.5 15.37,47.5 | 15.37,47.5 12.83,47.5 v9.02,51.31 | v15.37,46.86 15.37,47.5
SDA4  (via drill 0.38)
  Top 0.178: J17.3 35.06,47 35.05,46.99 34.42,47.62 34.42,51.31 | J18.3 41.27,39.88 U5.2 v41.27,46.86 41.27,47 | R18.1 37.21,56.39 34.42,53.59 34.42,51.31 | J19.3 53.48,48 v53.98,47.5 | v34.92,51.31 34.42,51.31
  Bottom 0.178: v53.98,47.5 41.27,47.5 | 41.27,47.5 38.73,47.5 v34.92,51.31 | v41.27,46.86 41.27,47.5
SDA5  (via drill 0.38)
  Top 0.178: 62.09,46.99 J21.3 60.97,47 60.96,46.99 60.33,47.62 60.33,51.31 | J22.3 67.18,39.88 U6.2 v67.18,46.86 67.18,47 | R22.1 63.12,56.39 60.33,53.59 60.33,51.31 | J23.3 79.38,48 v79.88,47.5 | v60.83,51.31 60.33,51.31
  Bottom 0.178: v79.88,47.5 67.18,47.5 | 67.18,47.5 64.64,47.5 v60.83,51.31 | v67.18,46.86 67.18,47.5
SDA6  (via drill 0.38)
  Top 0.178: 10.28,72.9 J25.3 9.15,72.91 9.14,72.9 8.51,73.53 8.51,77.22 | J26.3 15.37,65.79 U7.2 v15.37,72.77 15.37,72.91 | R26.1 11.3,82.3 8.51,79.5 8.51,77.22 | J27.3 27.57,73.91 v28.07,73.41 | v9.02,77.22 8.51,77.22
  Bottom 0.178: v28.07,73.41 15.37,73.41 | 15.37,73.41 12.83,73.41 v9.02,77.22 | v15.37,72.77 15.37,73.41
SDA7  (via drill 0.38)
  Top 0.178: 36.19,72.9 J29.3 35.06,72.91 35.05,72.9 34.42,73.53 34.42,77.22 | J30.3 41.27,65.79 U8.2 v41.27,72.77 41.27,72.91 | R30.1 37.21,82.3 34.42,79.5 34.42,77.22 | J31.3 53.48,73.91 v53.98,73.41 | v34.92,77.22 34.42,77.22
  Bottom 0.178: v53.98,73.41 41.27,73.41 | 41.27,73.41 38.73,73.41 v34.92,77.22 | v41.27,72.77 41.27,73.41
SDA8  (via drill 0.38)
  Top 0.178: 62.09,72.9 J33.3 60.97,72.91 60.96,72.9 60.33,73.53 60.33,77.22 | J34.3 67.18,65.79 U9.2 v67.18,72.77 67.18,72.91 | R34.1 63.12,82.3 60.33,79.5 60.33,77.22 | J35.3 79.38,73.91 v79.88,73.41 | v60.83,77.22 60.33,77.22
  Bottom 0.178: v79.88,73.41 67.18,73.41 | 67.18,73.41 64.64,73.41 v60.83,77.22 | v67.18,72.77 67.18,73.41

## Text on the board
Bottom: X01 | X01 | X01 | X01 | X01 | X01 | X01 | X01 | X01
Dimension: vscore | vscore | vscore | vscore
tPlace: GridEYE | GridEYE | GridEYE | GND | 3.3V | SDA | SCL | INT | GND | 3.3V | SDA | SCL | INT | GND | 3.3V | SDA | SCL | INT | GridEYE | GridEYE | GridEYE | GND | 3.3V | SDA | SCL | INT | GND | 3.3V | SDA | SCL | INT | GND | 3.3V | SDA | SCL | INT | GridEYE | GridEYE | GridEYE | GND | 3.3V | SDA | SCL | INT | GND | 3.3V | SDA | SCL | INT | GND | 3.3V | SDA | SCL | INT
bPlace: GridEYE | GridEYE | GridEYE | I2C ADR | I2C ADR | I2C ADR | GND | 3.3V | SDA | SCL | INT | GND | 3.3V | SDA | SCL | INT | GND | 3.3V | SDA | SCL | INT | GridEYE | GridEYE | GridEYE | I2C ADR | I2C ADR | I2C ADR | GND | 3.3V | SDA | SCL | INT | GND | 3.3V | SDA | SCL | INT | GND | 3.3V | SDA | SCL | INT | GridEYE | GridEYE | GridEYE | I2C ADR | I2C ADR | I2C ADR | GND | 3.3V | SDA | SCL | INT | GND | 3.3V | SDA | SCL | INT | GND | 3.3V | SDA | SCL | INT